# Altium PCB MotherBoard.PcbDoc
Units mm, origin at the board's own origin, x right, y up, seen from the top; angles counter-clockwise.
Board outline 50 x 65 mm, 2 copper layers (Top Signal Layer, Bottom Signal Layer), stack 1.571 mm thick; 69 components, 51 nets, 216 pads, 66 vias.
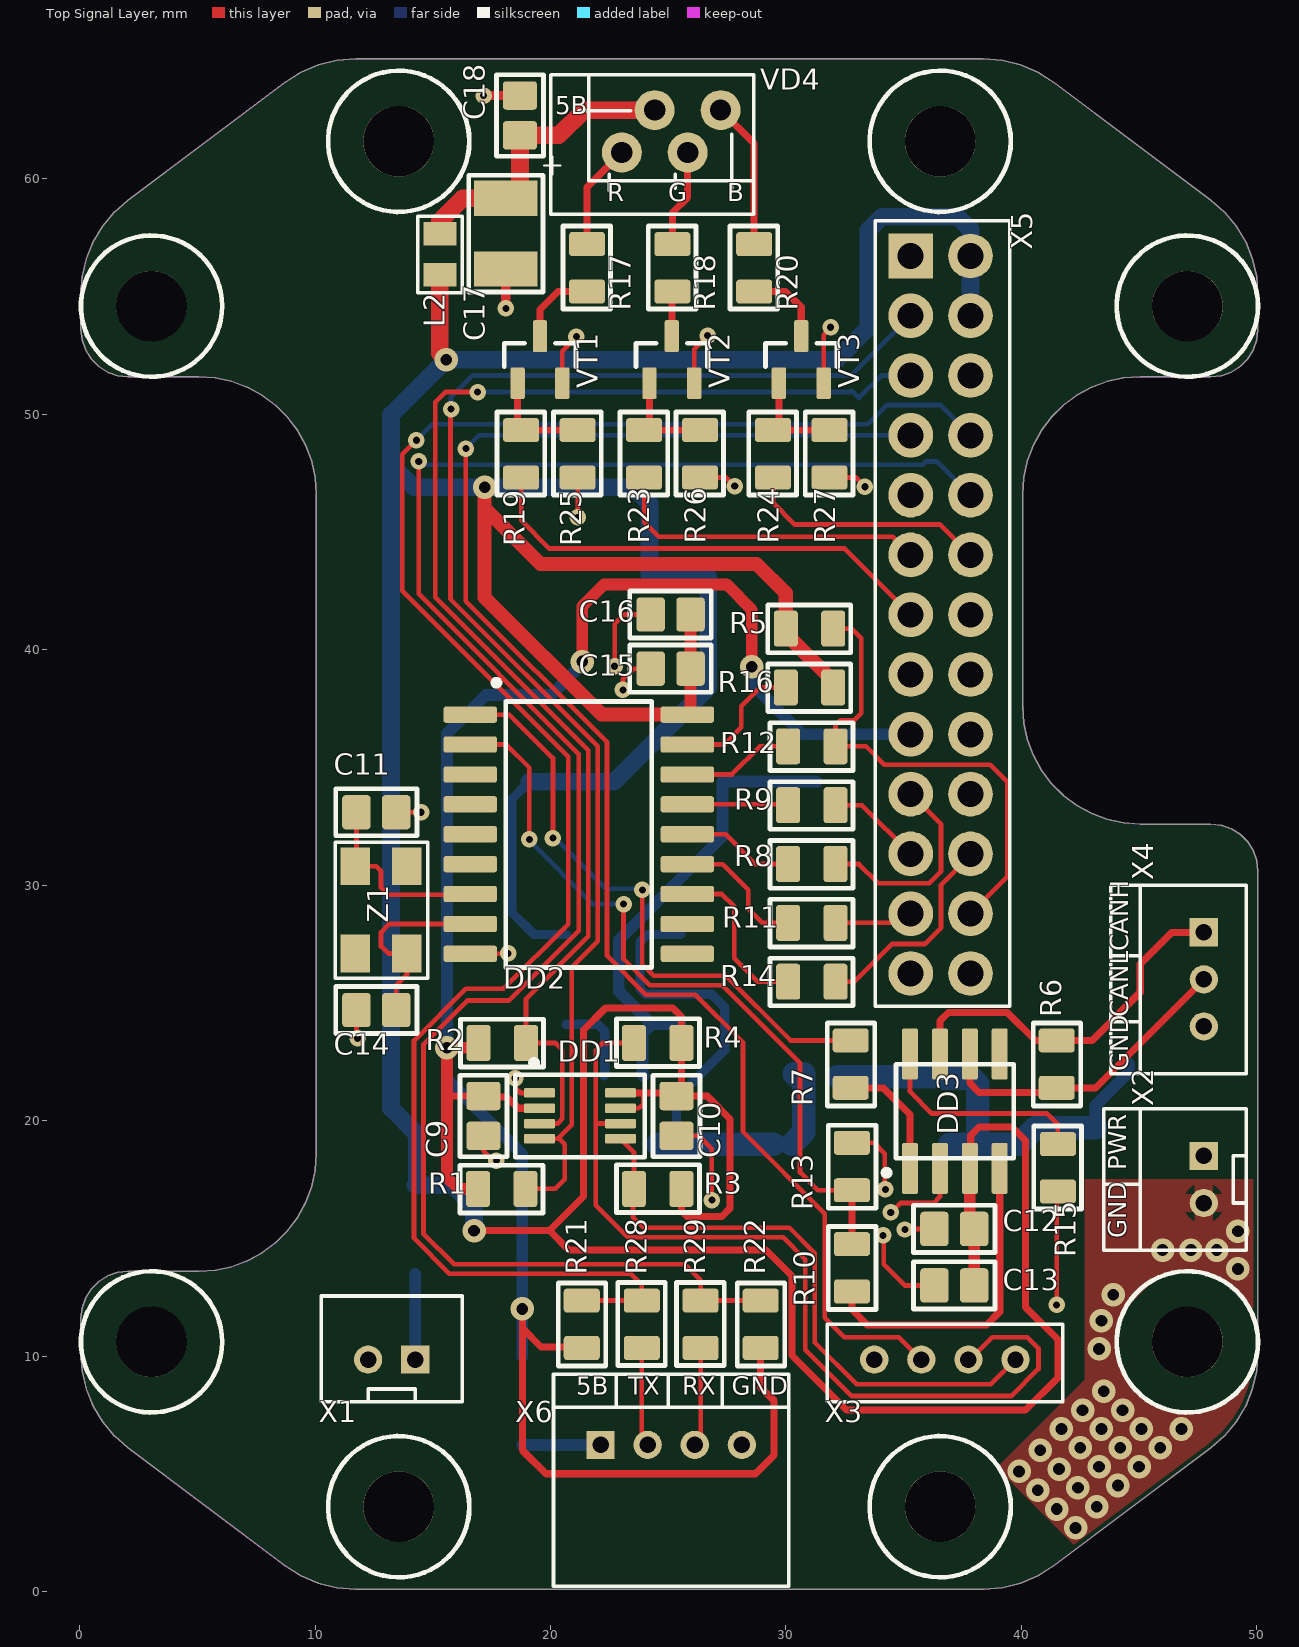
[diagram p0: Top Signal Layer view]
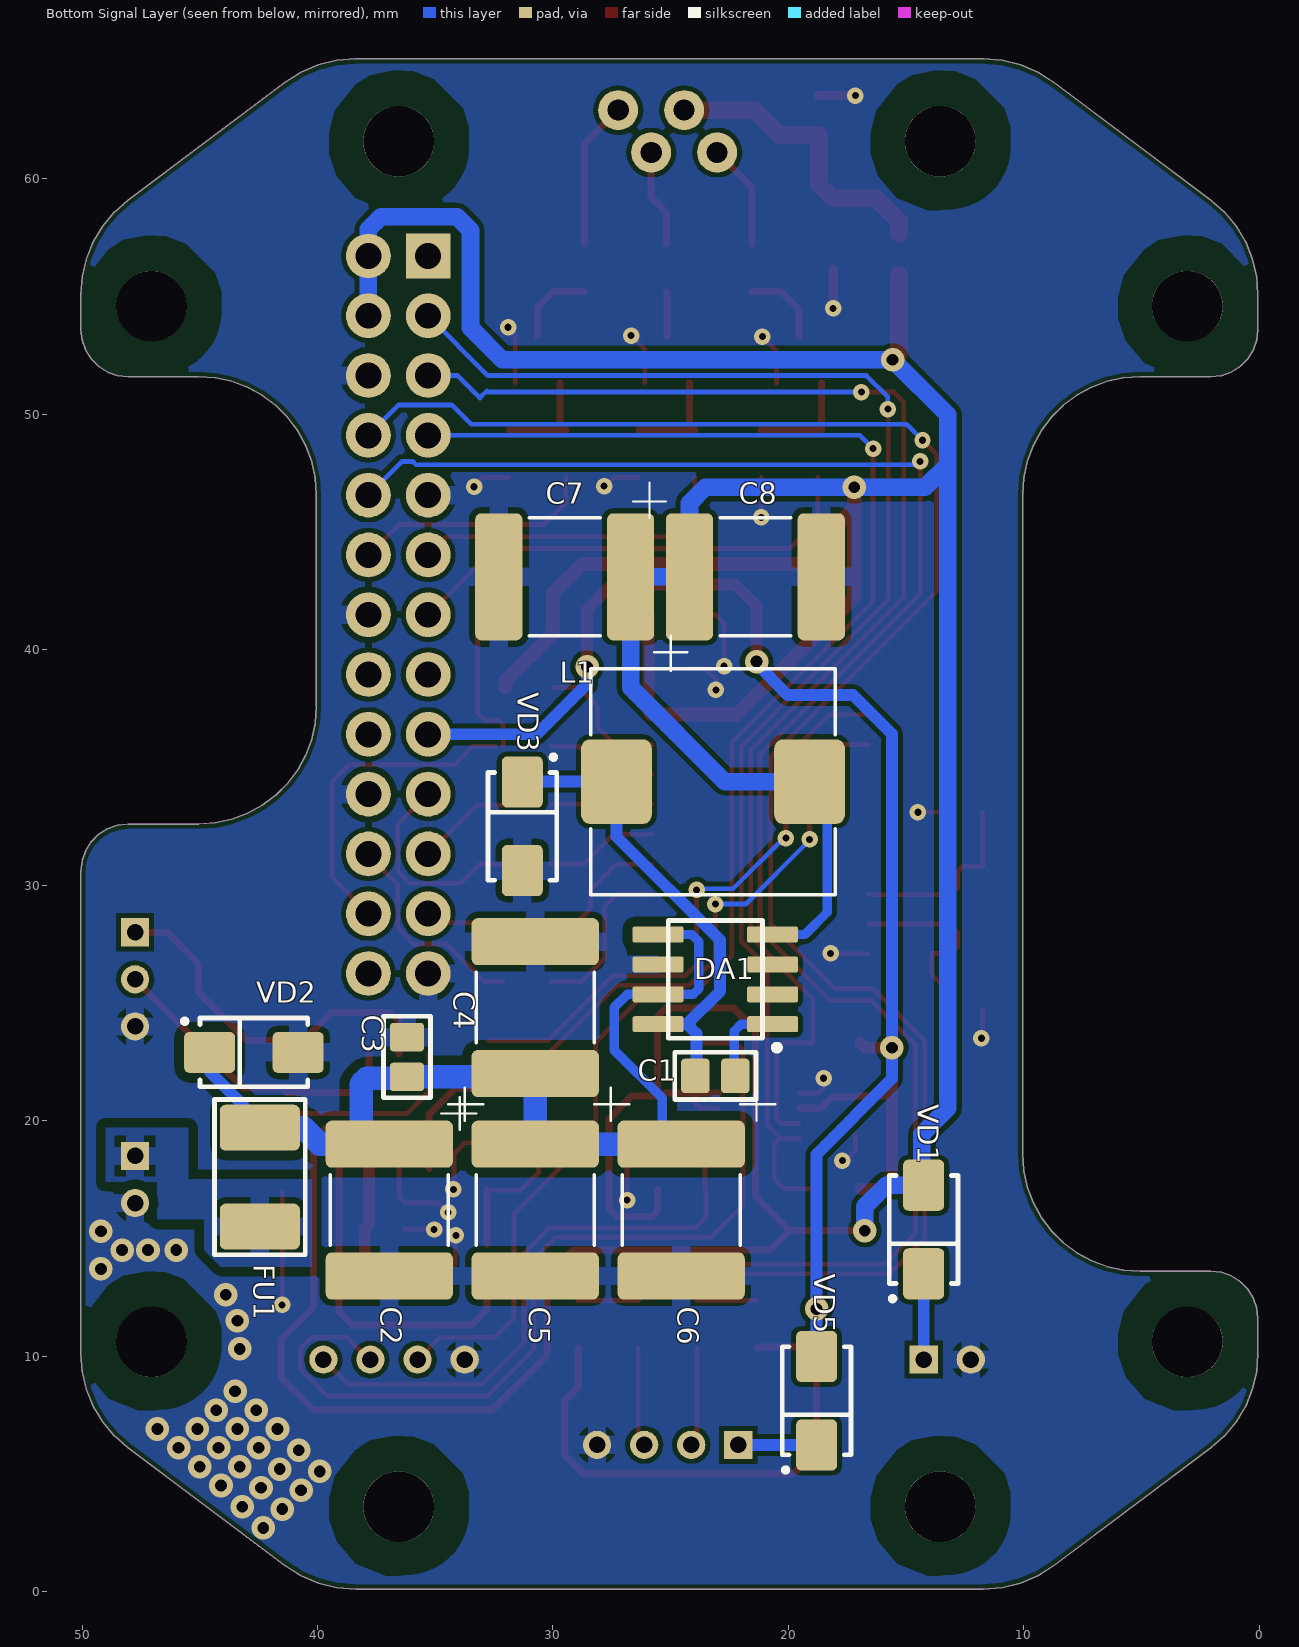
[diagram p1: Bottom Signal Layer view, seen from below]

## Layer stack, top to bottom
Top Solder: solder mask 0.0102, Solder Resist, Dk 3.5
Top Signal Layer: signal copper 0.0356
Dielectric 1: core 1.5, FR-4, Dk 4.2
Bottom Signal Layer: signal copper 0.0356
Bottom Solder: solder mask 0.0102, Solder Resist, Dk 3.5

## Board outline
50.05,10.1 50.05,30.6 50,31.045 49.852,31.468 49.614,31.847 49.297,32.164 48.918,32.402 48.495,32.55 48.05,32.6 45.05,32.6 44.338,32.651 43.641,32.803 42.973,33.052 42.347,33.394 41.776,33.821 41.271,34.326 40.844,34.897 40.502,35.523 40.253,36.191 40.101,36.888 40.05,37.6 40.05,46.6 40.101,47.312 40.253,48.009 40.502,48.677 40.844,49.303 41.271,49.874 41.776,50.379 42.347,50.806 42.973,51.148 43.641,51.397 44.338,51.549 45.05,51.6 48.05,51.6 48.495,51.65 48.918,51.798 49.297,52.036 49.614,52.353 49.852,52.732 50,53.155 50.05,53.6 50.05,55.1 49.99,55.87 49.813,56.621 49.522,57.336 49.125,57.998 48.63,58.591 48.05,59.1 41.383,64.1 40.704,64.529 39.964,64.843 39.184,65.035 38.383,65.1 11.717,65.1 10.916,65.035 10.136,64.843 9.396,64.529 8.717,64.1 2.05,59.1 1.47,58.591 0.975,57.998 0.578,57.336 0.287,56.621 0.11,55.87 0.05,55.1 0.05,53.6 0.1,53.155 0.248,52.732 0.486,52.353 0.803,52.036 1.182,51.798 1.605,51.65 2.05,51.6 5.05,51.6 5.762,51.549 6.459,51.397 7.127,51.148 7.753,50.806 8.324,50.379 8.829,49.874 9.256,49.303 9.598,48.677 9.847,48.009 9.999,47.312 10.05,46.6 10.05,18.6 9.999,17.888 9.847,17.191 9.598,16.523 9.256,15.897 8.829,15.326 8.324,14.821 7.753,14.394 7.127,14.052 6.459,13.803 5.762,13.651 5.05,13.6 2.05,13.6 1.605,13.55 1.182,13.402 0.803,13.164 0.486,12.847 0.248,12.468 0.1,12.045 0.05,11.6 0.05,10.1 0.11,9.33 0.287,8.579 0.578,7.864 0.975,7.202 1.47,6.609 2.05,6.1 8.717,1.1 9.396,0.671 10.136,0.357 10.916,0.165 11.717,0.1 38.383,0.1 39.184,0.165 39.964,0.357 40.704,0.671 41.383,1.1 48.05,6.1 48.63,6.609 49.125,7.202 49.522,7.864 49.813,8.579 49.99,9.33

## Design rules (kind name [scope] priority, off if disabled: settings)
Clearance Clearance_FU [InNet('NetFU1_1') vs InNet('GND')] p1: gap=0.4
Clearance Clearance_12 [InNet('12B') vs InNet('GND')] p2: gap=0.4
Clearance Clearance_tracks_inner [OnLayer('Power Layer') OR OnLayer('Ground Layer')] p3: gap=0.35 // Зазоры между проводниками на внутренних слоях
Clearance Clearance_1 [All] p4: gap=0.2
ComponentClearance [All] p1: gap=0.3 collisioncheckmode=3 verticalgap=0.01 showdistances=FALSE
HoleSize [All] p1: absolutevalues=TRUE maxlimit=10 minlimit=0.3 maxpercent=80.000 minpercent=20.000
MinimumSolderMaskSliver [All] p1: minsoldermaskwidth=0.09
PolygonConnect PolygonConnect_Via [IsVia] p1: connectstyle=Direct reliefconductorwidth=0.254 reliefentries=4 polygonreliefangle="90 Angle" airgapwidth=0.2
PolygonConnect PolygonConnect_1 [All] p2: connectstyle=Relief reliefconductorwidth=0.8 reliefentries=4 polygonreliefangle="90 Angle" airgapwidth=0.254
RoutingCorners [All] p1: cornerstyle=Round minsetback=0.2 maxsetback=2
RoutingVias [All] p1: holewidth=0.711 width=1.27 viastyle="Through Hole" minholewidth=0.711 minwidth=1.27 maxholewidth=0.711 maxwidth=1.27
SilkToSilkClearance [All] p1: silktosilkclearance=0
SilkToSolderMaskClearance [IsPad] p1: minsilkscreentomaskgap=0 clearancetoexposedcopper=TRUE
SolderMaskExpansion [All] p1: expansion=0.05
Width [All] p1: maxlimit=4 minlimit=0.2 preferedwidth=0.2
Width 3,3В [InNet('3,3В')] p2: maxlimit=2 minlimit=0.2 preferedwidth=1
Width 24В [InNet('24В')] p3: maxlimit=4 minlimit=0.2 preferedwidth=4
Width 5В [InNet('5В')] p4: maxlimit=3 minlimit=0.2 preferedwidth=3
24 further rules are at their usual default settings.

## Components (designator, comment, footprint, x,y, rotation, side; value= is the part's Value field where it differs from the comment)
C1 "0,01мк" C0805 23.1,21.9 r0 bottom
C2 "22мк" "TANTAL CASE D" 36.95,16.2 r270 bottom
C3 "0,1мк" C0805 36.2,22.7 r270 bottom
C4 "22мк" "TANTAL CASE D" 30.75,24.8 r90 bottom
C5 "22мк" "TANTAL CASE D" 30.75,16.2 r270 bottom
C6 "22мк" "TANTAL CASE D" 24.55,16.2 r270 bottom
C7 "56мк" "TANTAL CASE D" 29.5,43.1 r0 bottom
C8 "56мк" "TANTAL CASE D" 21.4,43.1 r180 bottom
C9 "0,1мк" C0805 17.15,20.2 r90 top
C10 "0,1мк" C0805 25.35,20.2 r90 top
C11 "22" C0805 12.6,33.1 r0 top
C12 "0,1мк" C0805 37.15,15.4 r0 top
C13 "1мк" C0805 37.15,13 r0 top
C14 "22" C0805 12.6,24.7 r180 top
C15 "0,1мк" C0805 25.1,39.2 r0 top
C16 "1мк" C0805 25.1,41.5 r0 top
C17 "10мк" "TANTAL CASE B" 18.3,57.7 r270 top
C18 "0,1мк" C0805 18.7,62.7 r270 top
DA1 "LM2672M-5.0/NOPB" SO8 23.1,26 r0 bottom
DD1 "PCA9306" SSOP8 21.25,20.2 r0 top
DD2 "MCP2515-I/SO" SO-18 21.2,32.8 r0 top
DD3 "MCP2551-I/SN" SO8 37.175,20.4 r90 top
FU1 "MF-MSMF050" FUSE812 42.45,17.6 r90 bottom
L1 "68 мкГн" IND_B82464G4223M 23.2,34.4 r180 bottom
L2 "XXX" L0805 15.3,56.8 r90 top
R1 "10к" R0805 17.925,17.1 r180 top
R2 "10к" R0805 17.95,23.3 r180 top
R3 "10к" R0805 24.55,17.1 r0 top
R4 "10к" R0805 24.55,23.3 r0 top
R5 "10к" R0805 31,40.9 r180 top
R6 "120" R0805 41.5,22.4 r270 top
R7 "47" R0805 32.75,22.4 r270 top
R8 "47" R0805 31.1,30.9 r180 top
R9 "47" R0805 31.1,33.4 r180 top
R10 "10к" R0805 32.8,13.75 r270 top
R11 "47" R0805 31.1,28.4 r180 top
R12 "47" R0805 31.1,35.9 r180 top
R13 "18к" R0805 32.8,18.05 r270 top
R14 "47" R0805 31.1,25.9 r180 top
R15 "10к" R0805 41.55,18 r90 top
R16 "10к" R0805 31,38.4 r180 top
R17 "220" R0805 21.55,56.225 r90 top
R18 "220" R0805 25.175,56.225 r90 top
R19 "47" R0805 18.75,48.325 r90 top
R20 "220" R0805 28.65,56.225 r90 top
R21 "10к" R0805 21.325,11.35 r270 top
R22 "10к" R0805 28.925,11.35 r270 top
R23 "47" R0805 23.975,48.325 r90 top
R24 "47" R0805 29.45,48.325 r90 top
R25 "10к" R0805 21.15,48.325 r90 top
R26 "10к" R0805 26.35,48.325 r90 top
R27 "10к" R0805 31.85,48.325 r90 top
R28 "47" R0805 23.875,11.35 r90 top
R29 "47" R0805 26.375,11.35 r90 top
VD1 "SK34A" SMA 14.25,15.375 r90 bottom
VD2 "SMAJ12A-TR" SMA 42.7,22.9 r180 bottom
VD3 "SK34A" SMA 31.3,32.5 r270 bottom
VD4 "BL-L515RGBC-CA" RGB_LED 25.125,62.925 r180 top
VD5 "SK34A" SMA 18.8,8.1 r90 bottom
VT1 "IRLML2402" SOT23-3 19.55,52.325 r90 top
VT2 "IRLML2402" SOT23-3 25.15,52.325 r90 top
VT3 "IRLML2402" SOT23-3 30.65,52.325 r90 top
X1 "" MW-2M_without3D 14.25,9.85 r270 top locked
X2 "Вход питания" MW-2M 47.75,17.5 r0 top locked
X3 "" MW-4M_WITHOUT3D 39.75,9.85 r270 top locked
X4 "" MW-3M 47.75,27 r0 top locked
X5 "" PLS-26 35.298,56.73 r0 top locked
X6 "UART" MW-4MR 25.125,6.225 r90 top
Z1 "8MHz" QSMD5.0x3.2x1.0 11.7,27.1 r90 top

## Footprints (in the part's own frame and the unit in brackets; to place one, negate y for a bottom-side part, rotate by r counter-clockwise, add the part's x,y. Pads: shape width x height; smd on the part's side, far side on the other; paste and mask are expansions set on the pad)
C0805 [mm]
  rrect25% 1.21x1.46 smd paste-5: 1(-0.845,0) 2(0.845,0)
  silkscreen extent -1.73,-1 1.73,1, body extent -1,-0.62 1,0.63, height 0.78
FUSE812 [mm] "Самовосстанавливающийся предохранитель"
  rrect25% 1.95x3.4 smd: 1(-2.1,0) 2(2.1,0)
  silkscreen extent -3.3,-1.93 3.3,1.93, body extent -2.41,-1.61 2.41,1.61, height 1.32
IND_B82464G4223M [mm] "22 мкГн, 2.25 А, 10х10, Катушка индуктивности SMD"
  rrect25% 3x3.6 smd: 1(-4.1,0) 2(4.1,0)
  silkscreen extent -5.2,-4.8 5.2,4.8, body extent -5.2,-5.2 5.2,5.2, height 4.8
L0805 [mm] "SMD LED LAMP"
  rect 1x1.4 smd: 1(-0.875,0) 2(0.875,0)
  silkscreen extent -1.63,-0.95 1.63,0.95, body extent -1,-0.6 1,0.6, height 0.95
MW-2M [mm]
  rect 1.2x1.2 hole 0.7: 1(0,1)
  round 1.2 hole 0.7: 2(0,-1)
  silkscreen extent -2.7,-3 1.8,3, body extent -2.7,-2.95 1.8,2.95, height 6
MW-2M_without3D [mm]
  rect 1.2x1.2 hole 0.7: 1(0,0)
  round 1.2 hole 0.7: 2(0,-2)
  silkscreen extent -2.7,-4 1.8,2
MW-3M [mm]
  rect 1.2x1.2 hole 0.7: 1(0,1)
  round 1.2 hole 0.7: 2(0,-1) 3(0,-3)
  silkscreen extent -2.7,-5 1.8,3, body extent -2.7,-4.95 1.8,2.95, height 6
MW-4M_WITHOUT3D [mm]
  round 1.2 hole 0.7: 1(0,0) 2(0,-2) 3(0,-4) 4(0,-6)
  silkscreen extent -1.5,-8 1.8,2
MW-4MR [mm]
  rect 1.2x1.2 hole 0.7: 1(0,3)
  round 1.2 hole 0.7: 2(0,1) 3(0,-1) 4(0,-3)
  silkscreen extent -6,-5 1.6,5, body extent -6,-4.95 1.6,4.95, height 4.8
PLS-26 [mm]
  rect 1.9x1.9 hole 1.1: 1(0,0)
  round 1.9 hole 1.1: 2(2.54,0) 3(0,-2.54) 4(2.54,-2.54) 5(0,-5.08) 6(2.54,-5.08) 8(2.54,-7.62) 9(0,-10.16) 10(2.54,-10.16) 11(0,-12.7) 12(2.54,-12.7) 13(0,-15.24) 14(2.54,-15.24) 15(0,-17.78) 16(2.54,-17.78) 19(0,-22.86) 20(2.54,-22.86) 21(0,-25.4) 22(2.54,-25.4) 23(0,-27.94) 24(2.54,-27.94) 25(0,-30.48) 26(2.54,-30.48)
  round 1.9 hole 1.1 mask+0.102: 7(0,-7.62) 17(0,-20.32) 18(2.54,-20.32)
  silkscreen extent -1.5,-31.88 4.2,1.5, body extent -1.24,-31.75 3.84,1.27, height 8.54
QSMD5.0x3.2x1.0 [mm] "Кварцевый резонатор KX-9A 8MHz"
  rect 1.6x1.25 smd: 1(0,-2.2) 2(3.7,0) ""(0,0) ""(3.7,-2.2)
  silkscreen extent -1.05,-3.08 4.72,0.85, body extent -0.65,-2.7 4.35,0.5, height 1.01
R0805 [mm] "Chip Resistor, 2-Leads, Body 2,10x1,30mm, IPC Medium Density"
  rrect25% 1.02x1.53 smd paste-5: 1(-1.007,0) 2(1.007,0)
  silkscreen extent -1.75,-1 1.78,1.03, body extent -1.1,-0.7 1.1,0.7, height 0.55
RGB_LED [mm]
  round 1.7 hole 0.9: 1(-2.1,0) 2(-0.7,1.8) 3(0.7,0) 4(2.1,1.8)
  silkscreen extent -3.5,-1.5 3.5,3, body extent -2.75,-14.6 2.7,3, height 2.95
SMA [mm]
  rrect25% 2.17x1.74 smd: 1(-1.88,0) 2(1.88,0)
  silkscreen extent -3.04,-1.46 2.29,1.46, body extent -2.5,-1.35 2.5,1.35, height 2.15
SO8 [mm]
  rrect25% 2.17x0.68 smd: 1(-2.43,1.905) 2(-2.43,0.635) 3(-2.43,-0.635) 4(-2.43,-1.905) 5(2.43,-1.905) 6(2.43,-0.635) 7(2.43,0.635) 8(2.43,1.905)
  silkscreen extent -2.74,-2.5 2,3.02, body extent -3,-2.54 3,2.54, height 1.7
SO-18 [mm] "16-Pin Small Outline Integrated Circuit 1.27 mm Pitch, IPC Low Density"
  rrect25% 2.26x0.69 smd: 1(-4.61,4.445) 2(-4.61,3.175) 3(-4.61,1.905) 4(-4.61,0.635) 5(-4.61,-0.635) 6(-4.61,-1.905) 7(-4.61,-3.175) 8(-4.61,-4.445) 9(-4.61,-5.715) 10(4.61,-5.715) 11(4.61,-4.445) 12(4.61,-3.175) 13(4.61,-1.905) 14(4.61,-0.635) 15(4.61,0.635) 16(4.61,1.905) 17(4.61,3.175) 18(4.61,4.445)
  silkscreen extent -3.62,-6.3 3.1,5.92, body extent -5.15,-6.41 5.16,5.17, height 2.48
SOT23-3 [mm]
  rrect25% 1.35x0.61 smd: 1(-1,0.95) 2(-1,-0.95) 3(1,0)
  silkscreen extent -0.3,-1.52 0.7,1.52, body extent -1.15,-1.5 1.15,1.5, height 1.1
SSOP8 [mm]
  rrect25% 1.32x0.4 smd: 1(-1.72,0.975) 2(-1.72,0.325) 3(-1.72,-0.325) 4(-1.72,-0.975) 5(1.72,-0.975) 6(1.72,-0.325) 7(1.72,0.325) 8(1.72,0.975)
  silkscreen extent -2.75,-1.75 2.75,2.37, body extent -2.1,-1.53 2.1,1.53, height 1.3
"TANTAL CASE B" [mm] "Конденсатор электролитический танталовый"
  rect 1.5x2.7 smd: 1(-1.475,-0.2) 2(1.525,-0.2)
  silkscreen extent -3.25,-1.78 2.51,2.12, body extent -1.7,-1.6 1.8,1.2, height 1.9
"TANTAL CASE D" [mm] "Конденсатор танталовый SMD"
  rrect25% 2x5.4 smd: 1(-2.8,0) 2(2.8,0)
  silkscreen extent -5.2,-2.5 1.5,4, body extent -3.8,-2.3 3.8,2.3, height 4

## Part data
C1 C3 C9 C10 C11 C12 C13 C14 C15 C16 C18: library part Capacitor, "Конденсатор"
C2 C4 C5 C6 C7 C8 C17: library part Capacitor_pol, "Конденсатор полярный"
DA1: library part LM2672, "Power Converter High Efficiency 1-A Step-Down Voltage"
DD1: "DUAL BIDIRECTIONAL I2C BUS AND SMBus VOLTAGE-LEVEL TRANSLATOR"
DD2: library part MCP2515, "CAN Controller With SPI™ Interface"
DD3: library part MCP2551, "High-Speed CAN Transceiver"
FU1: library part Fuse, "Предохранитель"
L1 L2: library part Inductor, "Катушка индуктивности"
R1 R2 R3 R4 R5 R6 R7 R8 R9 R10 R11 R12 R13 R14 R15 R16 R17 R18 R19 R20 R21 R22 R23 R24 R25 R26 R27 R28 R29: library part Resistor, "Резистор"
VD1 VD3 VD5: library part DiodeSchottky, "Диод Шоттки"
VD2: library part DiodeZener, "Стабилитрон"
VD4: library part RGB_LED_A, "RGB Светодиод с общим анодом"
VT1 VT2 VT3: library part N-MOSFET, "N-MOSFET"
X1 X2: library part Header_2_sct, "Разъем - 2 конт. розетка"
X3 X6: library part Header_4_sct, "Разъем - 4 конт. розетка"
X4: library part Header_3_sct, "Разъем - 2 конт. розетка"
X5: library part Header_26, "Разъем - 5 конт. розетка"
Z1: library part Crystal, "Кварцевый резонатор"

## Free pads (board coordinates)
  round 3 hole 3: ""(3.05,10.6) ""(3.05,54.6) ""(13.55,3.6) ""(13.55,61.6) ""(36.55,3.6) ""(36.55,61.6) ""(47.05,10.6) ""(47.05,54.6)

## Via types
v1: diameter 1, hole 0.5, Top Signal Layer to Bottom Signal Layer, tented both sides, 36 vias
v2: diameter 0.7, hole 0.3, Top Signal Layer to Bottom Signal Layer, tented both sides, 30 vias

## Nets (pads, with @x,y where several pads share a name; then routed paths per layer and width w, separated by ;. In a path a pad name is that pad's centre, name@x,y a point inside that pad or via, vN(x,y) a via of type N, cw(c..) or ccw(c..) an arc to the next point about the centre after c; other vN are vias at no path point)
3,3B: C9.2 DD1.2 R1.2 R2.2 R21.2 R22.2 VD5.2 X5.17 | length 93.7
  Top Signal Layer w0.3: 15.645,21.045 C9.2 17.195,21 18.15,21 18.625,20.525 DD1.2 ; v1(18.8,12) 18.8,11.19 ; R21.2 21.277,10.39 19.6,10.39 18.8,11.19 ; R22.2 28.925,8.675 29.5,8.1 29.5,5.8 28.7,5 19.8,5 18.8,6 18.8,11.19
  Top Signal Layer w0.5: R1.2 16.1,17.1 15.6,17.6 v1(15.6,23.1) 16.743,23.1 R2.2 ; v1(21.35,39.501) 21.35,41.85 22.275,42.775 27.475,42.775 28.55,41.7 v1(28.55,39.275)
  Bottom Signal Layer w0.5: VD5.2 18.8,18.575 15.6,21.775 v1(15.6,23.1) 15.6,36.425 17.25,38.075 20.023,38.075 21.35,39.402 v1(21.35,39.501) ; v1(28.55,39.275) 28.55,38.55 30.69,36.41 X5.17
5B: C7.1 C8.1 C10.2 C12.2 C13.2 C15.2 C16.2 DA1.4 DD1.7 DD1.8 DD2.18 DD3.3 L1.2 L2.1 R3.2 R4.2 R5.2 R16.1 VD1.2 X5.2 X5.4 | length 235.2
  Top Signal Layer w0.2: DD1.7@22.945,20.5 DD1.7 23.75,20.525 23.95,20.725 23.95,21.175
  Top Signal Layer w0.3: v1(16.75,15.325) 19.95,15.325 ; DD1.8 23.95,21.175 25.22,21.175 C10.2 ; R3.2 25.558,16.167 25.8,15.925 27.275,15.925 27.625,16.275 27.625,20.075 26.655,21.045 C10.2 ; DD3.3 37.85,18.01 37.85,19.375 38.2,19.725 39.6,19.725 40.175,19.15 40.175,12.075 41.55,10.7 41.55,9.075 40.175,7.7 32.575,7.7 30.25,10.025 30.25,13.4 29.15,14.5 20.775,14.5 19.95,15.325 ; 19.95,15.325 21.4,16.775 21.4,23.85 22.325,24.775 25.2,24.775 25.558,24.417 R4.2 25.558,21.252 C10.2
  Top Signal Layer w0.5: DD2.18 25.945,37.38 C15.2 C16.2 ; DD3.3 37.81,15.585 C12.2 C13.2
  Top Signal Layer w0.6: v1(17.2,46.9) 17.2,46.025 ; DD2.18 25.805,37.25 22.175,37.25 17.2,42.225 17.2,46.025 ; R16.1 32.008,38.667 29.993,40.682 R5.2 29.993,42.407 28.75,43.65 19.575,43.65 17.2,46.025
  Top Signal Layer w0.75: L2.1 15.3,52.597 v1(15.572,52.325)
  Bottom Signal Layer w0.4: L1.2 18.35,33.65 18.35,28.85 19.295,27.905 DA1.4
  Bottom Signal Layer w0.75: v1(16.75,15.325) 16.75,16.35 15.845,17.255 VD1.2 14.325,17.33 14.325,19.425 13.225,20.525 13.225,47.867 ; L1.2 22.7,34.4 26.7,38.4 C7.1 C8.1 24.2,46.225 23.525,46.9 v1(17.2,46.9) 14.192,46.9 13.225,47.867 ; X5.4 X5.2 37.838,57.862 37.3,58.4 34.075,58.4 33.5,57.825 33.5,53.675 32.15,52.325 v1(15.572,52.325) 13.225,49.978 13.225,47.867
5B_LED: C17.1 C18.2 L2.2 VD4.3 | length 12.8
  Top Signal Layer w0.75: L2.2 15.3,58.2 16.275,59.175 C17.1 18.7,59.775 C18.2 20.355,61.855 21.425,62.925 VD4.3
12B: C2.1 C3.2 C4.1 C5.1 C6.1 DA1.5 DA1.7 FU1.2 VD2.1 | length 42.1
  Bottom Signal Layer w0.4: C6.1@25.35,19 25.35,20.95 27.4,23 27.4,24.8 26.835,25.365 DA1.7 24.035,25.365 23.8,25.6 23.8,27.6 24.105,27.905 DA1.5
  Bottom Signal Layer w0.5: FU1.2@43.15,19.7 43.15,20.65 44.58,22.08 VD2.1@44.58,22.4
  Bottom Signal Layer w1: C6.1@25.35,19 C6.1 C5.1@29.45,19 ; C5.1@30.35,19.1 30.25,19 30.75,19.5 C4.1 ; C4.1@30.35,22 C4.1@30.495,21.855 ; C4.1@32.195,21.855 36.7,21.855 36.755,21.8 37.9,21.8 38.15,21.55 C2.1@38.15,19 ; C2.1 C2.1@38.15,19 ; FU1.2@43.15,19.7 40.6,19.7 39.9,19 C2.1@38.15,19
CAN_INT: R14.1 X5.22 | length 9.1
  Top Signal Layer w0.2: R14.1 32.9,25.9 34.5,27.5 35.9,27.5 36.588,28.188 36.588,30.022 37.838,31.272 X5.22
CS: R5.1 R12.1 X5.24 | length 20.6
  Top Signal Layer w0.2: R5.1 32.8,40.9 33.2,40.5 33.2,37.3 32.9,37 32.3,37 32.107,36.807 R12.1 ; R12.1@32.45,35.9 33.4,35.9 34.18,35.12 38.68,35.12 39.4,34.4 39.4,30.352 X5.24
GND: C2.2 C3.1 C4.2 C5.2 C6.2 C7.2 C8.2 C9.1 C10.1 C11.2 C12.1 C13.1 C14.2 C15.1 C16.1 C17.2 C18.1 DA1.6 DD1.1 DD2.9 DD3.2 R13.1 R15.1 R25.1 R26.1 R27.1 VD2.2 VD3.2 VT1.2 VT2.2 VT3.2 X1.2 X2.2 X3.4 X4.3 X5.6 X5.9 X5.14 X5.20 X5.25 X6.4 | length 47.4
  Top Signal Layer w0.2: C14.2 11.755,23.545 v2(11.8,23.5) ; C11.2 v2(14.5,33.1) ; DD2.9 18.185,27.085 v2(18.2,27.1) ; C9.1 17.15,18.72 17.57,18.3 v2(17.7,18.3) ; v2(18.5,21.8) 18.5,21.4 18.725,21.175 DD1.1 ; VT1.2 20.5,52.675 v2@21.075,53.25 ; v2(21.15,45.625) R25.1 ; v2(22.725,39.3) 22.725,41.1 23.125,41.5 C16.1 ; v2(23.075,38.3) 23.075,38.75 23.525,39.2 C15.1 ; C10.1 26.295,19.355 26.85,18.8 v2(26.85,16.625) ; VT2.2 26.1,52.775 v2(26.675,53.35) ; R26.1 27.457,47.317 v2(27.825,46.95) ; VT3.2 31.6,53.375 v2@31.9,53.675 ; R27.1 32.982,47.318 v2@33.35,46.95 ; R13.1 33.743,19.057 34.2,18.6 v2@34.2,17.275 ; v2@34.15,15.15 34.15,13.9 35.05,13 C13.1 ; v2(34.45,16.1) 34.85,16.5 36.275,16.5 36.54,16.765 DD3.2 ; v2@35.075,15.4 C12.1 ; v2(41.5,12.175) 41.5,16.943 R15.1
  Top Signal Layer w0.4: v2(17.155,63.545) C18.1 ; v2(18.1,54.5) C17.2
  other v1: 42.3,2.7 41.5,3.5 43.2,3.6 40.7,4.3 42.4,4.4 44.1,4.5 39.9,5.1 41.6,5.2 43.3,5.3 45,5.3 40.8,6 42.5,6.1 44.2,6.1 45.9,6.1 41.7,6.9 43.4,6.9 45.1,6.9 46.8,6.9 42.6,7.7 44.3,7.7 43.5,8.5 43.3,10.3 43.4,11.5 43.9,12.6 49.2,13.7 46,14.5 47.2,14.5 48.3,14.5 49.2,15.3
  other v2: 34.125,15.125 35.05,15.375 34.225,17.075 33.35,46.925 21.1,53.3 31.9,53.7
LED_B: R24.1 X5.12 | length 10.4
  Top Signal Layer w0.2: R24.1 29.45,46.25 30.38,45.32 36.548,45.32 X5.12
LED_G: R23.1 X5.11 | length 13.8
  Top Signal Layer w0.2: R23.1 23.975,45.425 24.6,44.8 34.528,44.8 X5.11
LED_R: R19.1 X5.13 | length 20
  Top Signal Layer w0.2: R19.1 18.75,45.5 19.95,44.3 32.488,44.3 X5.13
MISO: R9.1 X5.21 | length 4.1
  Top Signal Layer w0.2: R9.1 33.228,33.4 X5.21 X5.21@35.268,31.3
MOSI: R8.1 X5.19 | length 9.5
  Top Signal Layer w0.2: R8.1 33.098,30.9 33.918,30.08 36.08,30.08 36.588,30.588 36.588,32.58 X5.19 X5.19@34.67,33.87
NetC1_1: C1.1 DA1.1 | length 3.7
  Bottom Signal Layer w0.4: DA1.1 22.005,24.095 22.3,23.8 22.3,21.945 C1.1
NetC1_2: C1.2 DA1.8 L1.1 VD3.1 | length 20.3
  Bottom Signal Layer w0.5: C1.2 23.9,21.945 23.9,23.7 24.295,24.095 24.305,24.095 ; DA1.8 24.305,24.095 ; VD3.1 31.28,34.4 L1.1 27.3,32.069 22.9,27.669 22.9,25.5 24.305,24.095
NetC11_1: C11.1 DD2.7 Z1.2 | length 8.1
  Top Signal Layer w0.2: C11.1 11.755,30.855 Z1.2 12.6,30.8 12.8,30.6 12.8,29.9 13.1,29.6 16.565,29.6 DD2.7
NetC14_1: C14.1 DD2.8 Z1.1 | length 8.3
  Top Signal Layer w0.2: C14.1 13.445,25.745 13.9,26.2 Z1.1 13.1,27.1 12.8,27.4 12.8,28 13.155,28.355 DD2.8
NetDD2_1: DD2.1 R7.1 | length 25.7
  Top Signal Layer w0.2: DD2.1 18.255,37.245 20.1,35.4 v2(20.1,32) ; v2(23.9,29.8) 23.9,26.631 24.381,26.15 27.45,26.15 30.192,23.407 R7.1
  Bottom Signal Layer w0.2: v2(20.1,32) 20.2,32 22.35,29.85 23.85,29.85 v2(23.9,29.8)
NetDD2_2: DD2.2 R10.1 R13.2 | length 32.2
  Top Signal Layer w0.2: DD2.2 18.125,35.975 19.1,35 v2(19.1,31.95) ; v2(23.1,29.2) 23.1,26.866 24.216,25.75 27.284,25.75 30.6,22.434 30.6,17.8 31.357,17.043 R13.2
  Top Signal Layer w0.3: R10.1 R13.2
  Bottom Signal Layer w0.2: v2(19.1,31.95) 19.1,31.9 21.8,29.2 v2(23.1,29.2)
NetDD2_12: DD2.12 R14.2 | length 7.1
  Top Signal Layer w0.2: DD2.12 27.275,29.625 27.8,29.1 27.8,26.9 28.8,25.9 R14.2
NetDD2_13: DD2.13 R11.2 | length 5.8
  Top Signal Layer w0.2: DD2.13 27.305,30.895 28.4,29.8 28.4,29 29,28.4 R11.2
NetDD2_14: DD2.14 R8.2 | length 4.8
  Top Signal Layer w0.2: DD2.14 27.435,32.165 28.7,30.9 R8.2
NetDD2_15: DD2.15 R9.2 | length 4.3
  Top Signal Layer w0.2: DD2.15 30.057,33.435 R9.2
NetDD2_16: DD2.16 R12.2 | length 4.8
  Top Signal Layer w0.2: DD2.16 27.705,34.705 28.9,35.9 R12.2
NetDD2_17: DD2.17 R16.2 | length 5.7
  Top Signal Layer w0.2: DD2.17 27.375,35.975 28.1,36.7 28.1,37.6 28.9,38.4 R16.2
NetDD3_1: DD3.1 R7.2 | length 5.3
  Top Signal Layer w0.3: R7.2 34.133,21.393 35.27,20.255 DD3.1
NetDD3_4: DD3.4 R10.2 | length 13.6
  Top Signal Layer w0.3: R10.2 32.8,11.975 33.45,11.325 38.525,11.325 39.08,11.88 DD3.4
NetDD3_6: DD3.6 R6.2 X4.2 | length 13.4
  Top Signal Layer w0.3: DD3.6@37.825,22.845 DD3.6 37.81,21.59 38.2,21.2 41.307,21.2 R6.2 43.143,21.393 X4.2
NetDD3_7: DD3.7 R6.1 X4.1 | length 15.9
  Top Signal Layer w0.3: DD3.7 36.54,24.24 36.9,24.6 39.4,24.6 40.593,23.407 R6.1 43.007,23.407 45.05,25.45 45.05,26.65 46.4,28 X4.1
NetDD3_8: DD3.8 R15.2 | length 9.3
  Top Signal Layer w0.2: DD3.8 35.27,21.23 36.2,20.3 41.1,20.3 41.55,19.85 R15.2
NetFU1_1: FU1.1 X2.1
NetR17_1: R17.1 VT1.3 | length 3.4
  Top Signal Layer w0.3: VT1.3 19.55,54.45 20.318,55.217 R17.1
NetR17_2: R17.2 VD4.4 | length 4.5
  Top Signal Layer w0.3: R17.2 21.55,59.65 VD4.4
NetR18_1: R18.1 VT2.3 | length 1.9
  Top Signal Layer w0.3: VT2.3 25.15,55.193 R18.1
NetR18_2: R18.2 VD4.2 | length 4.8
  Top Signal Layer w0.3: R18.2 25.175,58.575 25.825,59.225 VD4.2 VD4.2@26.275,60.675
NetR19_2: R19.2 R25.2 VT1.1 | length 4.6
  Top Signal Layer w0.3: R19.2@18.6,49.332 VT1.1 ; R19.2@18.9,49.482 R19.2 R25.2
NetR20_1: R20.1 VT3.3 | length 3.5
  Top Signal Layer w0.3: R20.1 29.982,55.218 30.65,54.55 VT3.3
NetR20_2: R20.2 VD4.1 | length 6.3
  Top Signal Layer w0.3: VD4.1 28.65,61.5 R20.2
NetR23_2: R23.2 R26.2 VT2.1 | length 4.5
  Top Signal Layer w0.3: VT2.1 24.2,49.557 R23.2 R26.2
NetR24_2: R24.2 R27.2 VT3.1 | length 4.5
  Top Signal Layer w0.3: VT3.1 29.7,49.582 R24.2 R27.2
NetR28_1: R28.1 X6.2 | length 4.2
  Top Signal Layer w0.2: R28.1 23.875,6.475 X6.2
NetR29_1: R29.1 X6.3 | length 4.2
  Top Signal Layer w0.2: X6.3 26.375,6.475 R29.1
NetVD1_1: VD1.1 X1.1 | length 3.6
  Bottom Signal Layer w0.5: X1.1 VD1.1
NetVD5_1: VD5.1 X6.1 | length 3.3
  Bottom Signal Layer w0.5: VD5.1 22.12,6.22 X6.1
READY: X3.3 X5.7 | length 68.4
  Top Signal Layer w0.2: v2(16.4,48.55) 16.4,42.069 22.4,36.069 22.4,27 24.05,25.35 26.15,25.35 28.175,23.325 28.175,19.525 31.65,16.05 31.65,11.625 32.475,10.8 34.8,10.8 X3.3
  Bottom Signal Layer w0.2: v2(16.4,48.55) 16.96,49.11 X5.7
RXD_3.3V: R22.1 R29.2 X5.10 | length 79.6
  Top Signal Layer w0.2: v2(14.4,48) 14.4,42.372 21.2,35.572 21.2,28.075 18.225,25.1 16.469,25.1 14.6,23.231 14.6,15.2 15.9,13.9 25.7,13.9 26.375,13.225 R29.2 ; R29.2@26.35,12.357 R29.2 ; R22.1@28.95,12.357 R22.1 R29.2
  Bottom Signal Layer w0.2: v2(14.4,48) 14.54,47.86 35.816,47.86 35.956,48 36.408,48 X5.10
SCK: R11.1 X5.23 | length 3.4
  Top Signal Layer w0.2: R11.1 34.908,28.4 X5.23 X5.23@35.288,28.8
SCL_3.3V: DD1.3 R2.1 X5.5 | length 57.9
  Top Signal Layer w0.2: v2(16.9,50.95) 15.525,50.95 15.1,50.525 15.1,42.237 21.6,35.737 21.6,27.825 18.958,25.183 R2.1 20.2,23.3 20.5,23 20.5,20.075 20.3,19.875 DD1.3
  Bottom Signal Layer w0.2: v2(16.9,50.95) 32.75,50.95 32.8,51 33.1,50.7 34.05,51.65 X5.5 X5.5@35.048,51.9
SCL_5V: DD1.6 R4.1 X3.2 | length 38.7
  Top Signal Layer w0.2: DD1.6 21.925,19.875 ; R4.1 22.225,23.3 21.925,23 21.925,19.875 ; X3.2 37.811,9.85 38.761,10.8 40.25,10.8 40.725,10.325 40.725,9.45 39.575,8.3 32.8,8.3 30.825,10.275 30.825,14.1 29.875,15.05 23.275,15.05 21.925,16.4 21.925,19.875
SDA_3.3V: DD1.4 R1.1 X5.3 | length 60.2
  Top Signal Layer w0.2: v2(15.775,50.225) 15.75,50.2 15.75,42.153 22,35.903 22,27.625 20.9,26.525 20.9,19.825 20.3,19.225 DD1.4 ; R1.1 20.2,17.1 20.6,17.5 20.6,19 20.375,19.225
  Bottom Signal Layer w0.2: v2(15.775,50.225) 15.775,50.744 16.681,51.65 32.758,51.65 X5.3
SDA_5V: DD1.5 R3.1 X3.1 | length 25.4
  Top Signal Layer w0.2: DD1.5 23.543,18.652 R3.1 23.5,17.057 23.5,15.9 23.95,15.45 30.15,15.45 31.225,14.375 31.225,10.575 33,8.8 38.7,8.8 X3.1
TXD_3.3V: R21.1 R28.2 X5.8 | length 79.1
  Top Signal Layer w0.2: v2(14.3,48.9) 13.7,48.3 13.7,48.1 13.7,42.506 20.75,35.456 20.75,28.35 18,25.6 16.4,25.6 14.2,23.4 14.2,15 15.7,13.5 23.4,13.5 23.875,13.025 R28.2 ; R21.1@21.35,12.357 R28.2@23.85,12.357
  Bottom Signal Layer w0.2: v2(14.3,48.9) 14.975,49.575 33.473,49.575 34.298,50.4 36.548,50.4 X5.8
pads on no net: DA1.2 DA1.3 DD2.3 DD2.4 DD2.5 DD2.6 DD2.10 DD2.11 DD3.5 X5.1 X5.15 X5.16 X5.18 X5.26 Z1.

## Polygon pours and split planes (outlines as drawn)
GND on Bottom Signal Layer "Top Layer-No Net" (solid, remove dead copper, pour order 54): 50.5,0 50.5,65.5 21.7,65.5 0.05,65.449 0.05,0 34,0
NetFU1_1 on Bottom Signal Layer "Top Layer-No Net" (solid, remove dead copper, pour order 52): 49,19.7 49,17.4 46.8,17.4 46.8,15.8 44.802,15.8 44.802,14.502 44.102,13.802 40.253,13.802 40.253,17.5 45.5,17.5 45.5,19.7
GND on Top Signal Layer "Top Layer-No Net" (solid, remove dead copper, pour order 58): 50.05,17.5 42.7,17.5 42.7,9 38.95,5.25 42.263,1.937 44.437,1.937 50,7.5 50.05,7.55

## Keep-outs
Keep-Out Layer:
  the board outline again, w0.01

## Other copper
Top Signal Layer:
  pour cut-out: 50,10.075 49.684,9.125 48.883,8.175 47.596,7.671 47.075,7.671 46.651,7.713 cw(c46.731,10.37) 44.075,10.45 44.075,11.225 44.3,11.9 45.688,13.288 46.417,13.567 47.234,13.609 48.262,13.413 48.883,13.025 49.775,11.9 50,10.95
Bottom Signal Layer:
  pour cut-out: 50,10.075 49.684,9.125 48.883,8.175 47.596,7.671 47.075,7.671 46.651,7.713 cw(c46.731,10.37) 44.075,10.45 44.075,11.225 44.3,11.9 45.688,13.288 46.417,13.567 47.234,13.609 48.262,13.413 48.883,13.025 49.775,11.9 50,10.95
  pour cut-out: 6,54.075 5.684,53.125 4.883,52.175 3.596,51.671 3.075,51.671 2.651,51.713 cw(c2.731,54.37) 0.075,54.45 0.075,55.225 0.338,56.012 1.567,57.242 2.417,57.567 3.235,57.609 4.262,57.412 4.883,57.025 5.775,55.9 6,54.95
  pour cut-out: 16.5,61.075 16.184,60.125 15.383,59.175 14.096,58.671 13.575,58.671 13.151,58.713 cw(c13.231,61.37) 10.575,61.45 10.575,62.225 10.837,63.013 12.067,64.242 12.917,64.567 13.734,64.609 14.762,64.413 15.383,64.025 16.275,62.9 16.5,61.95
  pour cut-out: 39.5,61.075 39.184,60.125 38.383,59.175 37.096,58.671 36.575,58.671 36.151,58.713 cw(c36.231,61.37) 33.575,61.45 33.575,62.225 33.838,63.013 35.067,64.242 35.917,64.567 36.735,64.609 37.762,64.413 38.383,64.025 39.275,62.9 39.5,61.95
  pour cut-out: 50,54.075 49.684,53.125 48.883,52.175 47.596,51.671 47.075,51.671 46.651,51.713 cw(c46.731,54.37) 44.075,54.45 44.075,55.225 44.337,56.012 45.567,57.242 46.417,57.567 47.234,57.609 48.262,57.412 48.883,57.025 49.775,55.9 50,54.95
  pour cut-out: 6,10.075 5.684,9.125 4.883,8.175 3.596,7.671 3.075,7.671 2.651,7.713 cw(c2.731,10.37) 0.075,10.45 0.075,11.225 0.338,12.013 1.567,13.242 2.417,13.567 3.235,13.609 4.262,13.413 4.883,13.025 5.775,11.9 6,10.95
  pour cut-out: 16.5,3.075 16.184,2.125 15.383,1.175 14.096,0.671 13.575,0.671 13.151,0.713 cw(c13.231,3.37) 10.575,3.45 10.575,4.225 10.837,5.012 12.067,6.242 12.917,6.567 13.734,6.609 14.762,6.412 15.383,6.025 16.275,4.9 16.5,3.95
  pour cut-out: 39.5,3.075 39.184,2.125 38.383,1.175 37.096,0.671 36.575,0.671 36.151,0.713 cw(c36.231,3.37) 33.575,3.45 33.575,4.225 33.838,5.012 35.067,6.242 35.917,6.567 36.735,6.609 37.762,6.412 38.383,6.025 39.275,4.9 39.5,3.95

## Silkscreen, mask and mechanical layers (free items; w line width, h text height)
Top Overlay:
  circle w0.2: c3.05,54.6 r3
  circle w0.2: c13.55,61.6 r3
  circle w0.2: c36.55,61.6 r3
  circle w0.2: c47.05,54.6 r3
  circle w0.2: c3.05,10.6 r3
  circle w0.2: c13.55,3.6 r3
  circle w0.2: c36.55,3.6 r3
  circle w0.2: c47.05,10.6 r3
  lines w0.15: 20.125,7.825 20.125,9.225 30.125,9.225 30.125,7.825 ; 21.2,62.9 23.4,62.9 ; 21.625,64.425 20.025,64.425 20,64.4 20,58.5 28.625,58.5 28.625,59.925 ; 22.5,59.5 22.5,60.2 ; 22.8,7.825 22.8,9.225 ; 25,7.825 25,9.225 ; 25.3,59.6 25.3,60.2 ; 27.3,7.825 27.3,9.2 ; 27.7,59.6 27.7,61.9 ; 43.5,17.3 45.05,17.3 ; 43.8,24.2 45.05,24.2 ; 43.8,27 45.05,27 ; 45.05,14.5 43.5,14.5 43.5,20.5 45.05,20.5 ; 45.05,22 43.8,22 43.8,30 ; 45.3,30 43.8,30 ; 43.8,30 43.8,30 ; 45.05,20.5 45.05,20.5
  text "5B" at 20.2,62.5 h1.3
  text "R" at 22.4,58.8 h1.3
  text "G" at 25,58.8 h1.3
  text "B" at 27.5,58.8 h1.3
  text "CANH" at 44.8,27.2 h1.3 r90
  text "CANL" at 44.8,24.4 h1.3 r90
  text "GND" at 44.8,22.1 h1.3 r90
  text "PWR" at 44.7,17.9 h1.3 r90
  text "GND" at 44.7,15 h1.3 r90
  text "5B" at 21.1,8.1 h1.3
  text "TX" at 23.3,8.1 h1.3
  text "RX" at 25.6,8.1 h1.3
  text "GND" at 27.7,8.1 h1.3